# Altium PCB IRpcb.PcbDoc
Units mil, origin at the board's own origin, x right, y up, seen from the top; angles counter-clockwise.
Board outline 2312 x 3312 mil, 4 copper layers (Top Layer, Internal Plane 1, Internal Plane 2, Bottom Layer), stack 18.2 mil thick; 4 components, 0 nets, 20 pads, 0 vias.
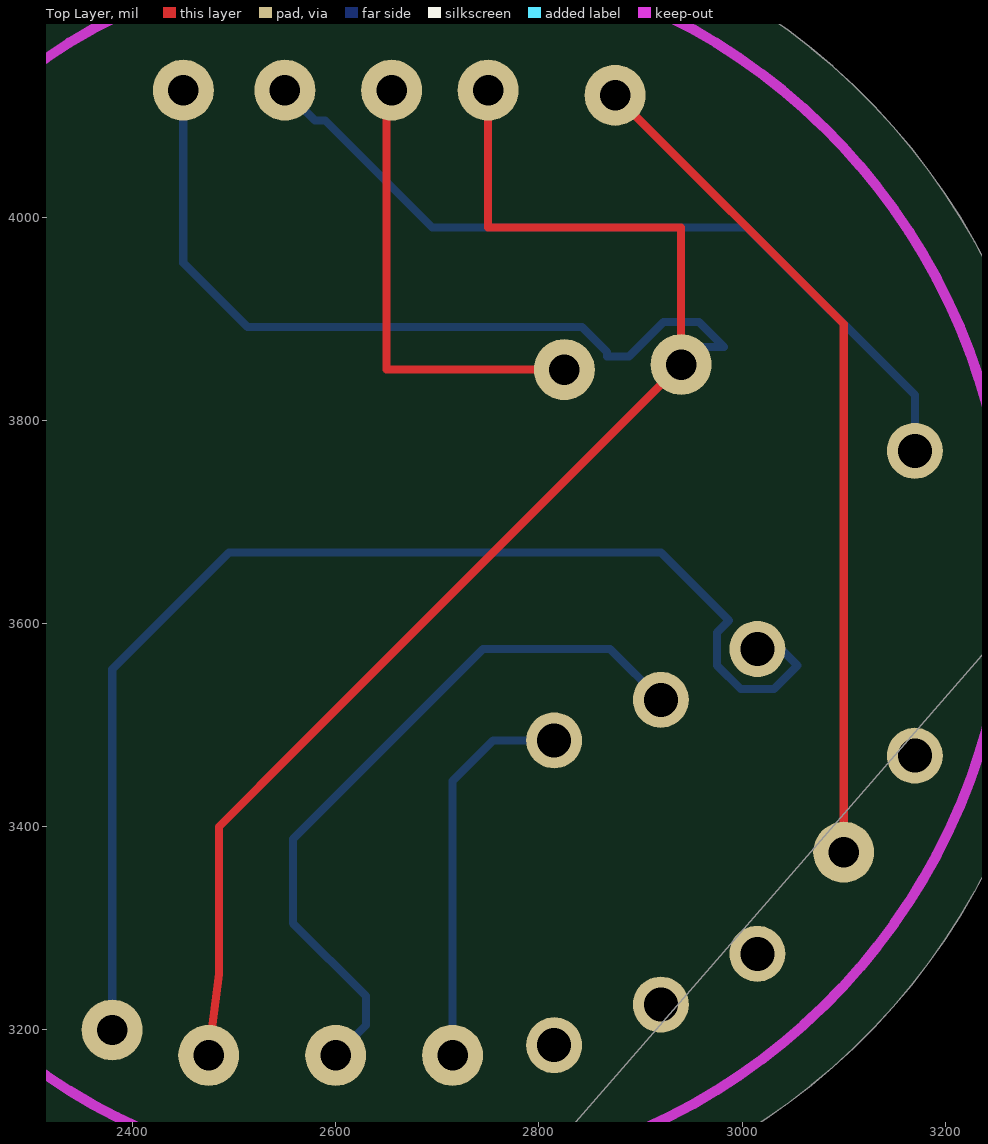
[diagram p0: Top Layer view]
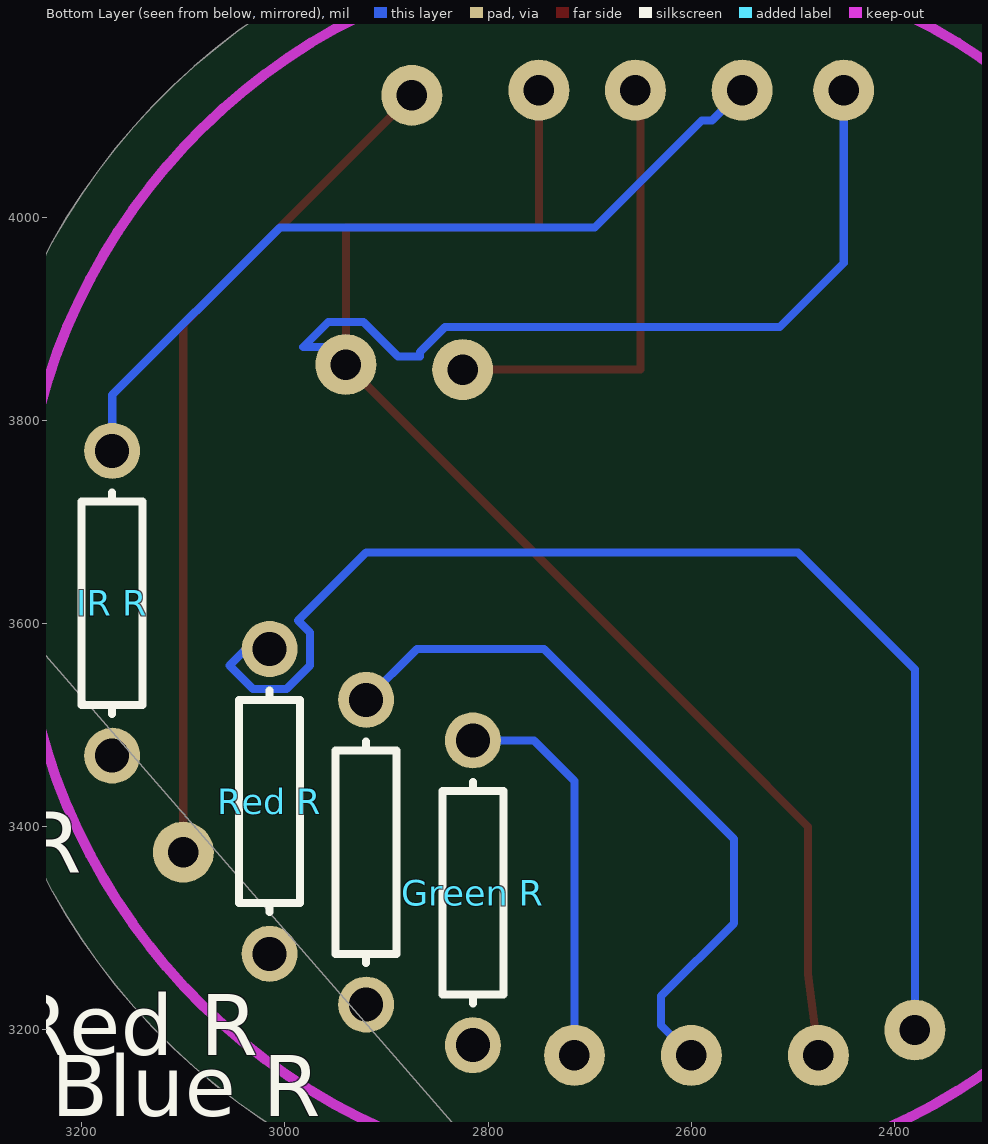
[diagram p1: Bottom Layer view, seen from below]
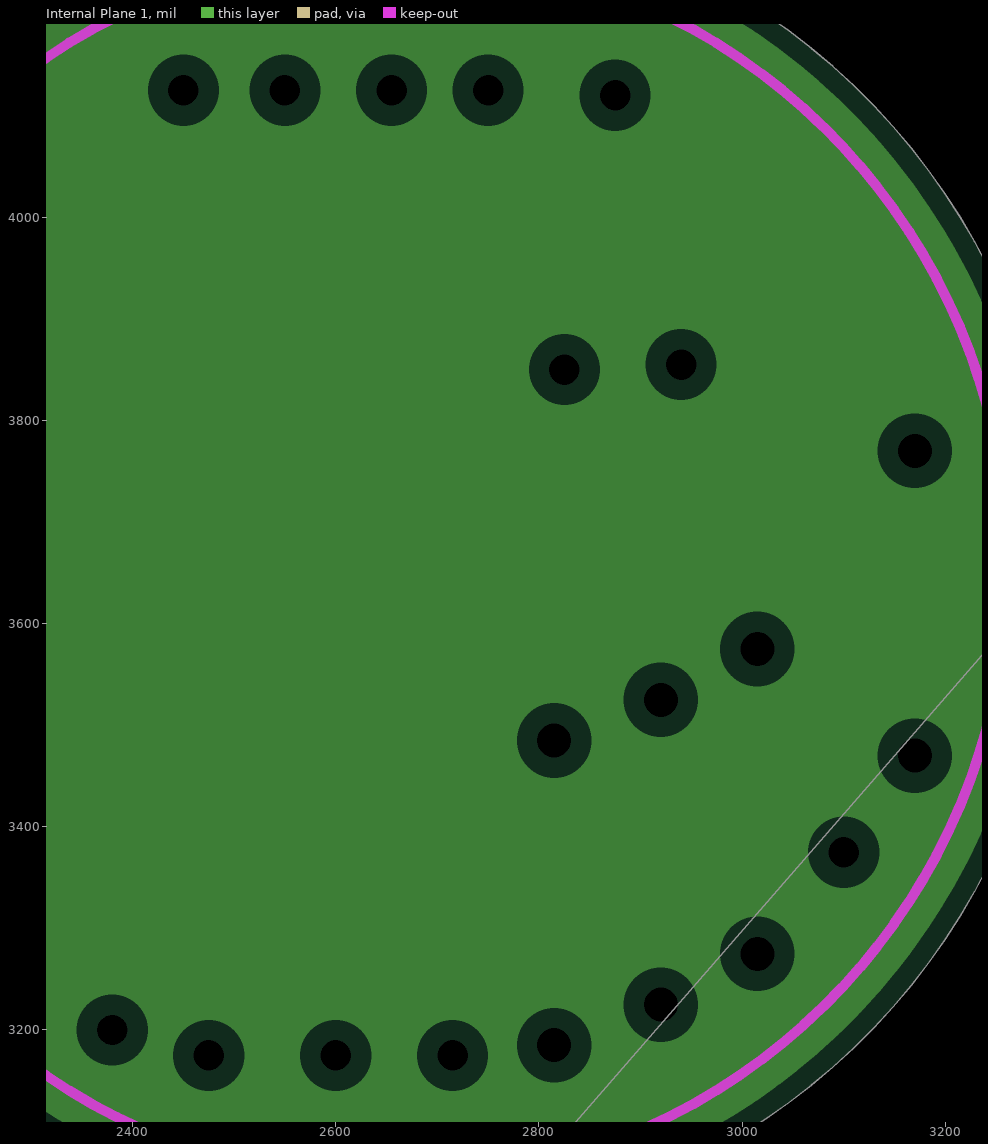
[diagram p2: Internal Plane 1, clearances drawn from the general rule]
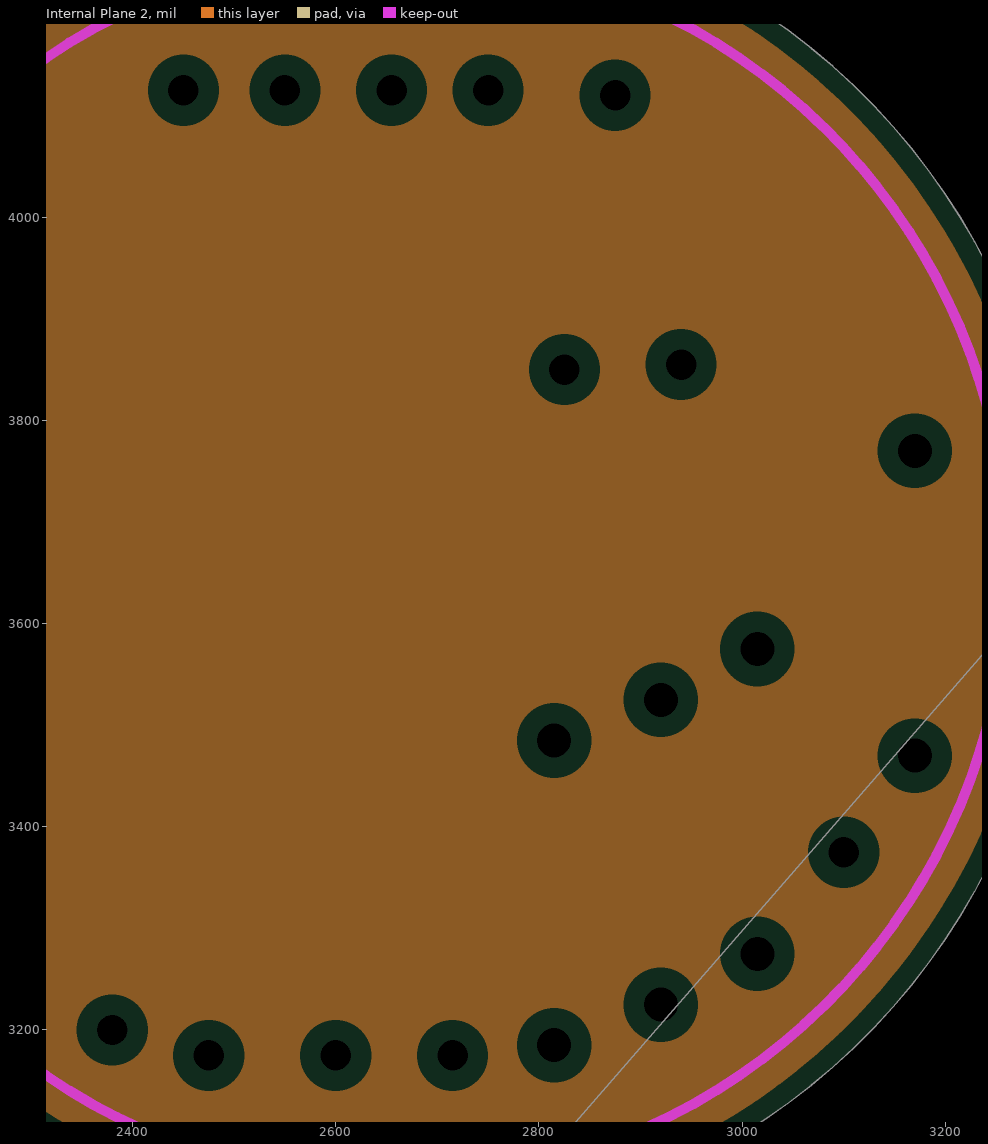
[diagram p3: Internal Plane 2, clearances drawn from the general rule]

## Layer stack, top to bottom
Top Solder: solder mask 0.4, Solder Resist, Dk 3.5
Top Layer: signal copper 1.4
Internal Plane 1: plane copper 1.4
Internal Plane 2: plane copper 1.4
Dielectric 1: dielectric 12.6, FR-4, Dk 4.8
Bottom Layer: signal copper 1.4
Bottom Solder: solder mask 0.4, Solder Resist, Dk 3.5

## Board outline
3312,3656 ccw(c2656,3656) 2656,4312 ccw(c2656,3656) 2000,3656 ccw(c2656,3656) 2656,3000 ccw(c2656,3656) 1000,1000

## Design rules (kind name [scope] priority, off if disabled: settings)
Clearance [All] p1: gap=8
PlaneClearance [All] p1: clearance=20
PlaneConnect [All] p1: planeconnectstyle=Relief reliefexpansion=20 reliefentries=4 reliefconductorwidth=10 reliefairgap=10
PolygonConnect [All] p1: connectstyle=Relief reliefconductorwidth=10 reliefentries=4 polygonreliefangle="90 Angle" airgapwidth=10
RoutingVias [All] p1: holewidth=25 width=40 viastyle="Through Hole" minholewidth=28 minwidth=50 maxholewidth=28 maxwidth=50
SolderMaskExpansion [All] p1: expansion=4
Width [All] p1: maxlimit=8 minlimit=8 preferedwidth=8
28 further rules are at their usual default settings.

## Components (designator, comment, footprint, x,y, rotation, side; value= is the part's Value field where it differs from the comment)
"Blue R" "Comment" AXIAL-0.3 2920,3375 r90 bottom
"Green R" "Comment" AXIAL-0.3 2815,3335 r270 bottom
"IR R" "Comment" AXIAL-0.3 3170,3620 r90 bottom
"Red R" "Comment" AXIAL-0.3 3015,3425 r90 bottom

## Footprints (in the part's own frame and the unit in brackets; to place one, negate y for a bottom-side part, rotate by r counter-clockwise, add the part's x,y. Pads: shape width x height; smd on the part's side, far side on the other; paste and mask are expansions set on the pad)
AXIAL-0.3 [mm] "Axial Device, Thru-Hole; 2 Leads; 0.3 in Pin Spacing"
  round 1.4 hole 0.85: 1(-3.81,0) 2(3.81,0)
  silkscreen extent -2.77,-0.76 2.77,0.76

## Part data
"Blue R" "Green R" "IR R" "Red R": library part Res1

## Free pads (board coordinates)
  round 60 hole 30: 0(2450,4125) 1(2550,4125) 2(2655,4125) 3(2750,4125) 4(2875,4120) 5(2475,3175) 6(2600,3175) 7(2715,3175) 8(2380,3200) 9(2825,3850) 10(2940,3855) 16(3100,3375)

## Nets (pads, with @x,y where several pads share a name; then routed paths per layer and width w, separated by ;. In a path a pad name is that pad's centre, name@x,y a point inside that pad or via, vN(x,y) a via of type N, cw(c..) or ccw(c..) an arc to the next point about the centre after c; other vN are vias at no path point)
pads on no net: "Blue R.1" "Blue R.2" "Green R.1" "Green R.2" "IR R.1" "IR R.2" "Red R.1" "Red R.2"
copper on no net: | length 6560.7
  Top Layer w8: 2475,3175 2485,3255 2485,3400 2565,3480 2940,3855 2940,3990 2750,3990 2750,4075.6 2750,4125 ; 2655,4125 2650,4120 2650,4070.6 2650,3850 2825,3850 ; 2880,4115 3100,3895 3100,3375
  Bottom Layer w8: 2380,3200 2380,3555 2495,3670 2920,3670 2987.03,3602.97 2975.44,3591.39 2975.44,3558.61 2998.61,3535.44 3031.39,3535.44 3054.56,3558.61 3038.17,3575 3015,3575 ; 2450,4125 2450,3955 2513,3892 2842.4,3892 2867,3867.4 2867,3863 2888.6,3863 2922.6,3897 2957.4,3897 2982,3872.4 2957.4,3872.4 2940,3855 ; 2550,4125 2579.7,4095.3 2589.7,4095.3 2695,3990 3005,3990 3170,3825 3170,3770 ; 2600,3175 2629.7,3204.7 2629.7,3233.3 2558,3305 2558,3388 2745,3575 2870,3575 2920,3525 ; 2715,3175 2715,3260 2715,3445 2755,3485 2815,3485

## Keep-outs
Keep-Out Layer:
  circle w10: c2656,3656 r606

## Silkscreen, mask and mechanical layers (free items; w line width, h text height)
Drill Drawing:
  text ".LEGEND" at 3512,3200 h60
  text "Drill Drawing." at 3512,3100 h60

## Dimensions
3262,3656 to 2050,3656 on Mechanical 1